# Altium PCB Badge_V2.PcbDoc
Units mm, origin at the board's own origin, x right, y up, seen from the top; angles counter-clockwise.
Board outline 100 x 100 mm, 2 copper layers (Top Layer, Bottom Layer); 48 components, 55 nets, 236 pads, 36 vias.
Unrouted connection lines stored in the file: 37.
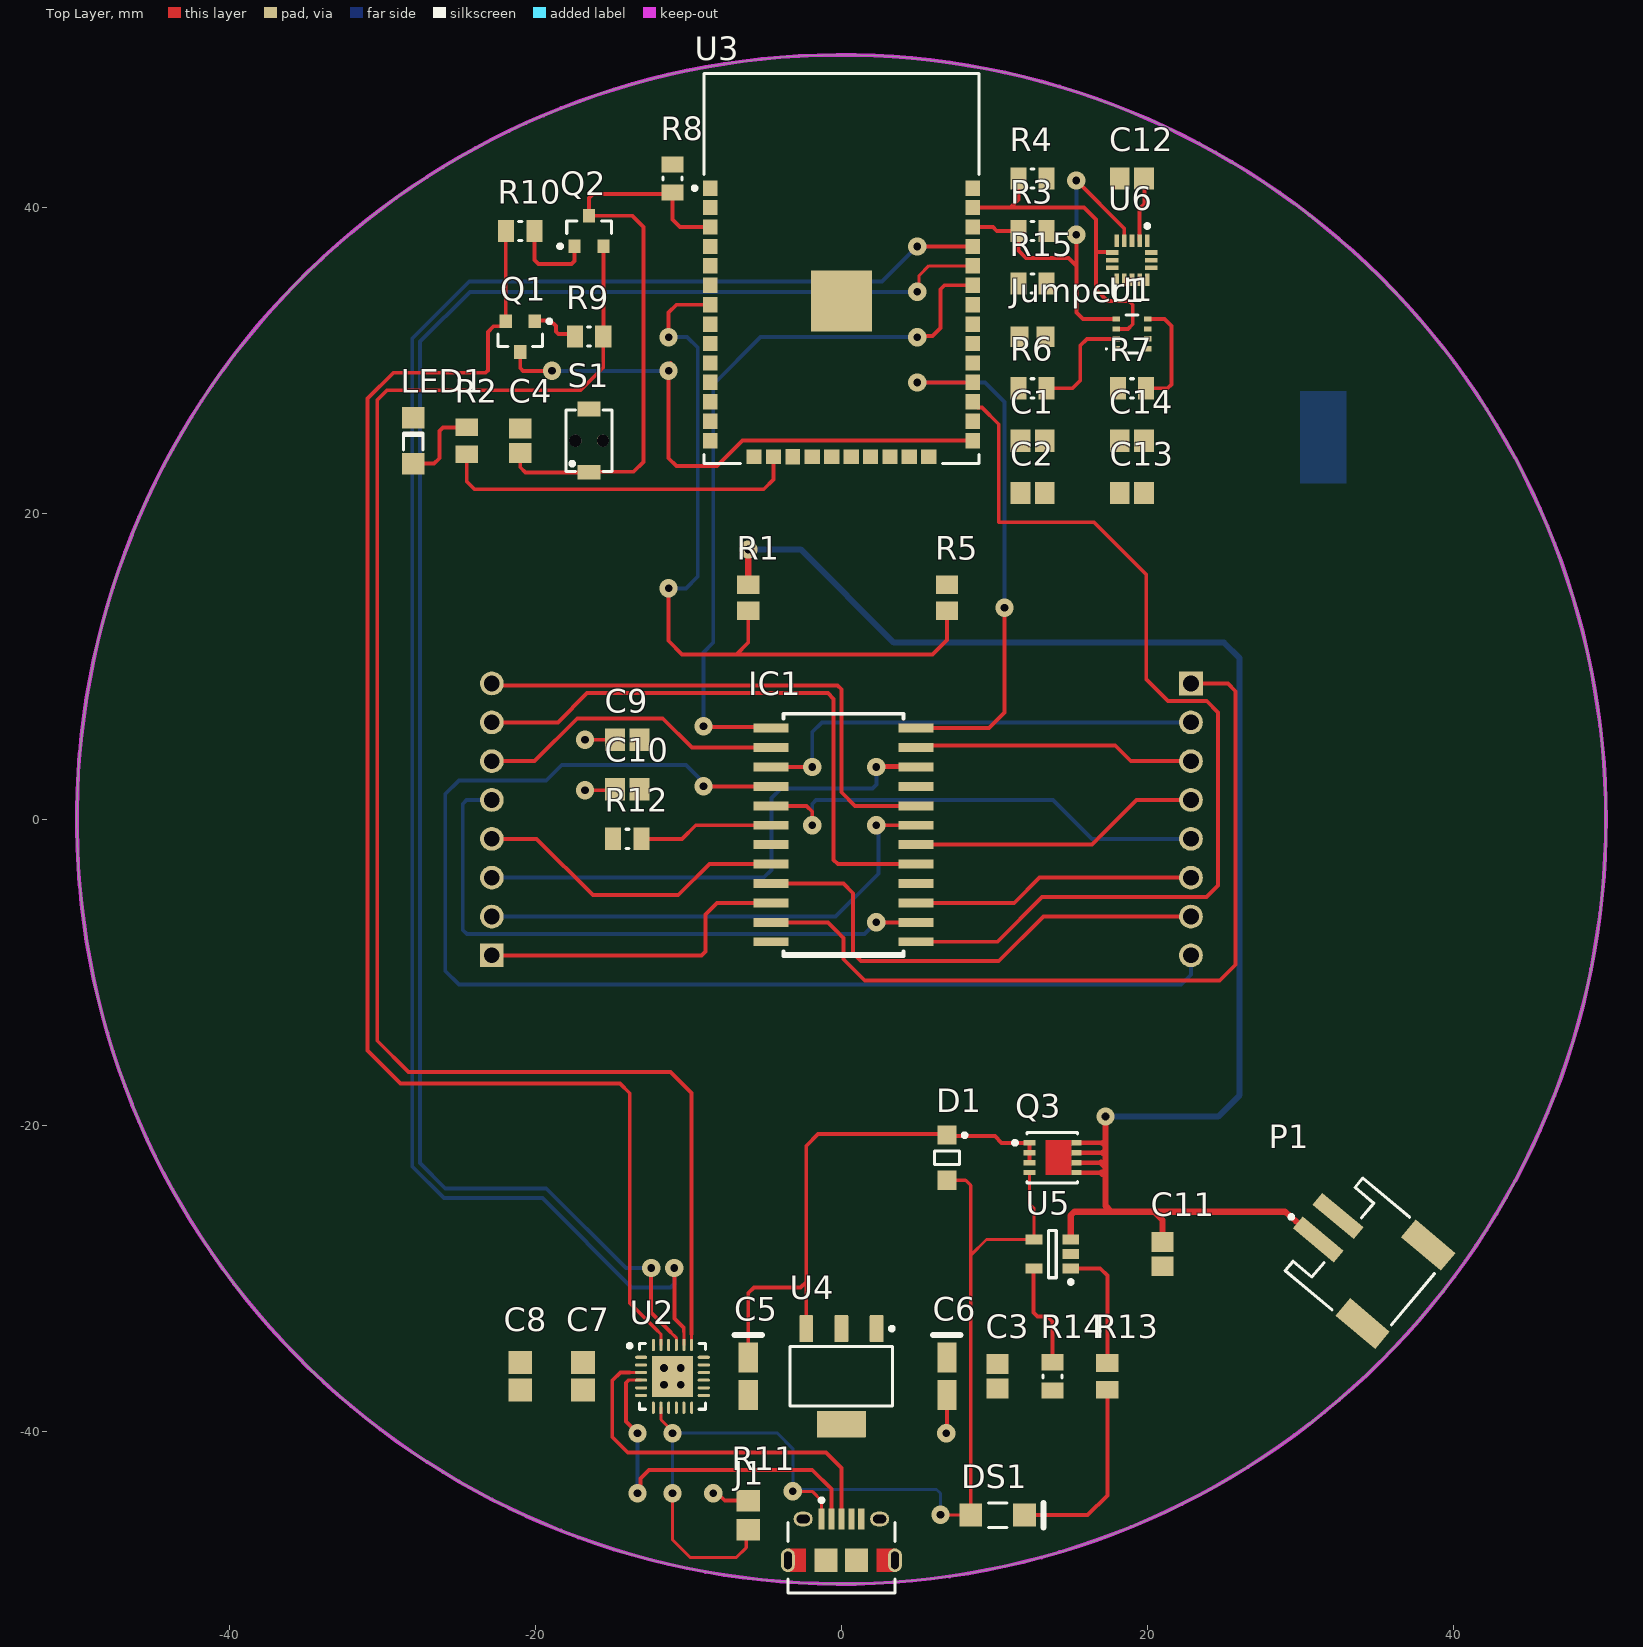
[diagram p0: Top Layer view]
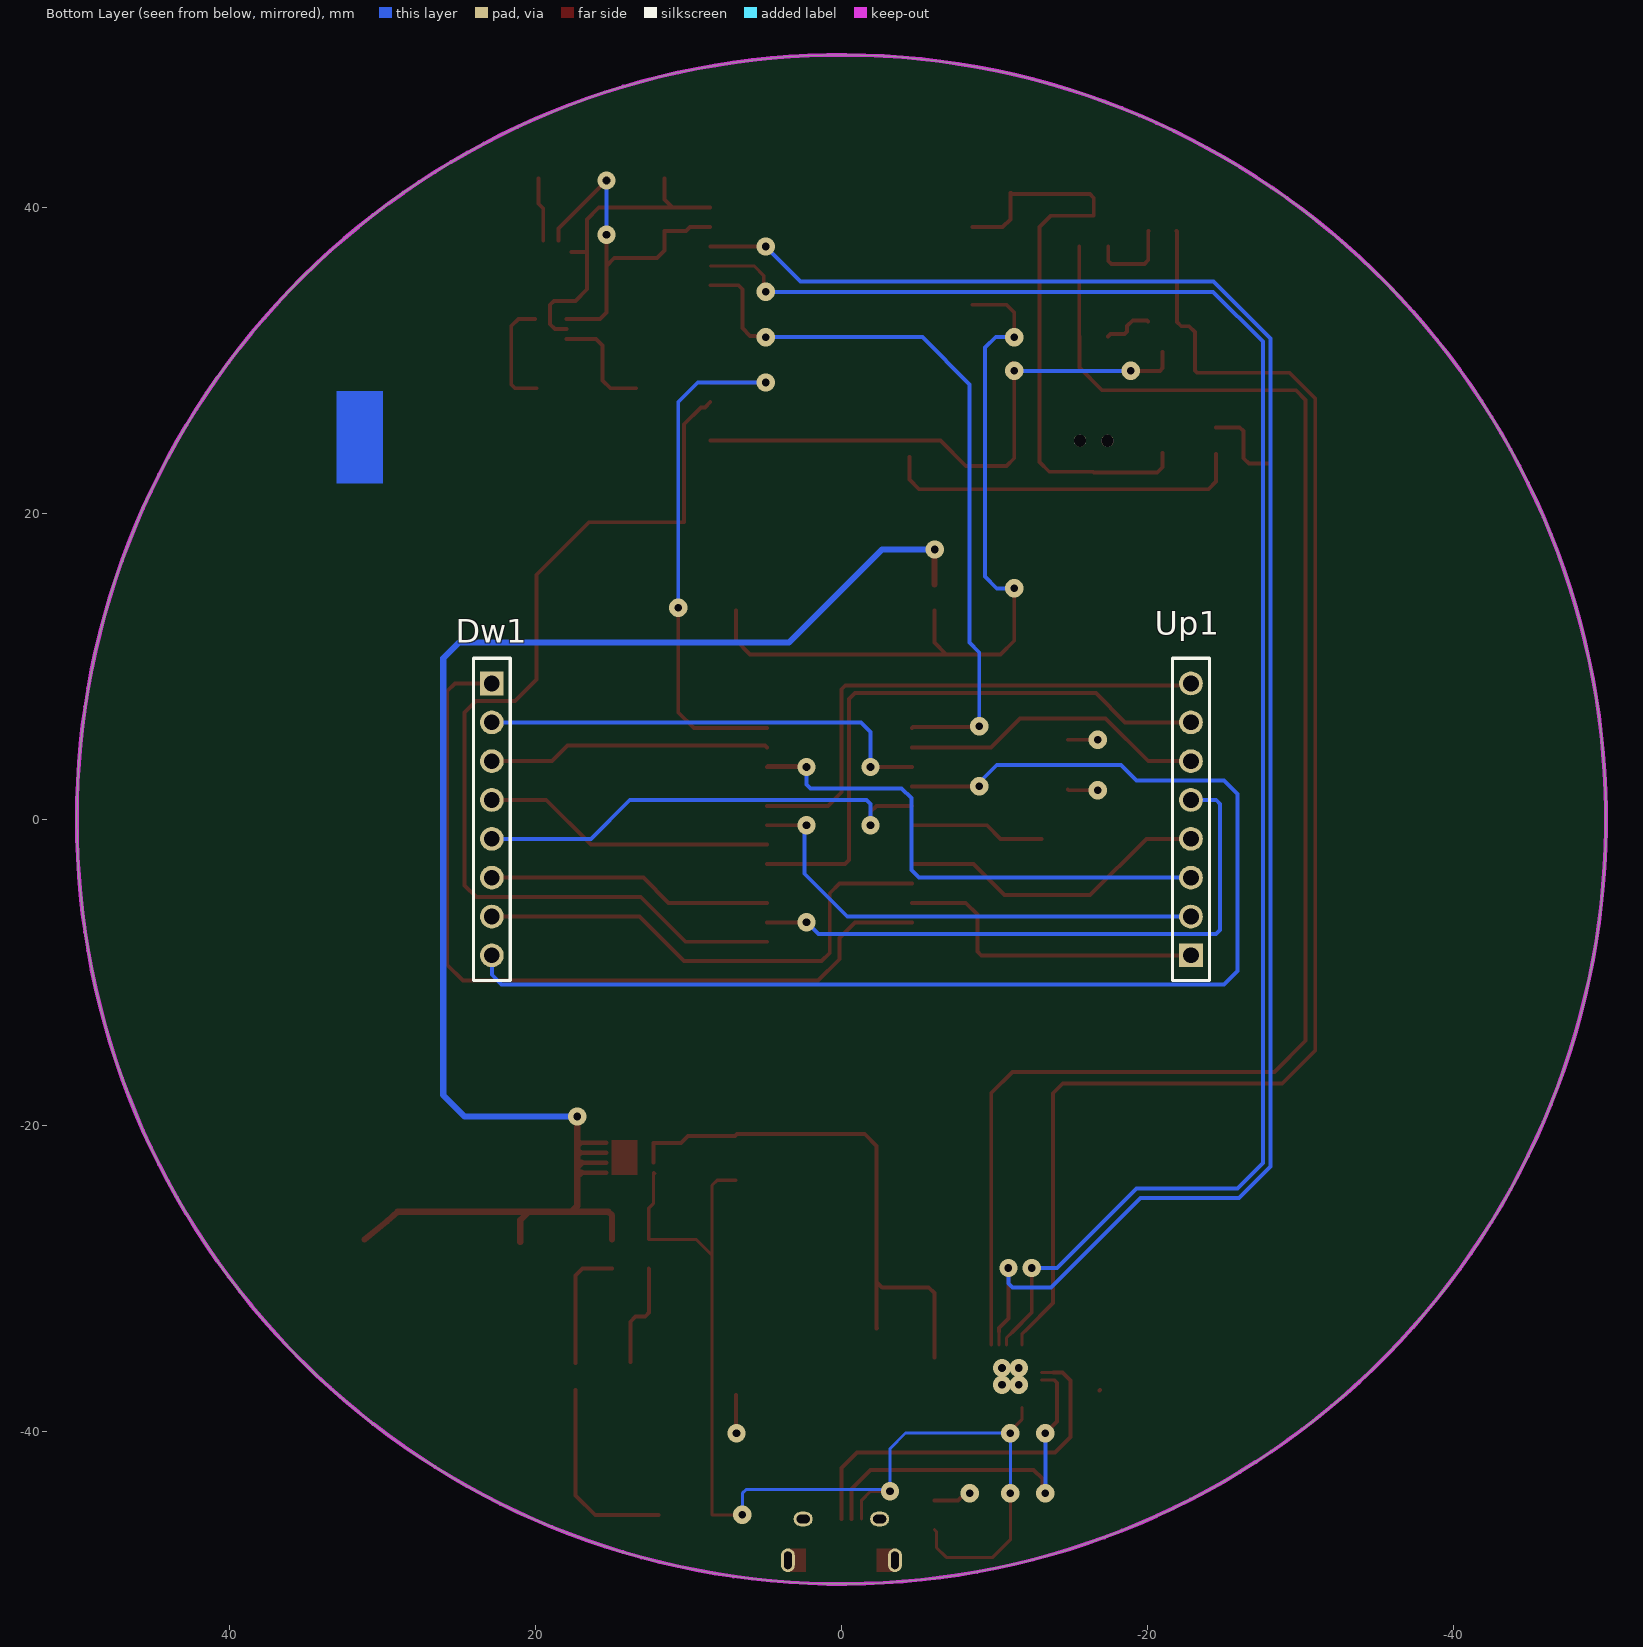
[diagram p1: Bottom Layer view, seen from below]

## Layer stack, top to bottom
Top Solder: solder mask 0.0102, Solder Resist, Dk 3.5
Top Layer: signal copper 0.0356
Dielectric 1: dielectric 0.32, FR-4, Dk 4.8
Bottom Layer: signal copper 0.0356
Bottom Solder: solder mask 0.0102, Solder Resist, Dk 3.5

## Board outline
-50,0 ccw(c0,0) 0,-50 ccw(c0,0) 50,0 ccw(c0,0) 0,50 ccw(c0,0)

## Design rules (kind name [scope] priority, off if disabled: settings)
Clearance [All] p1: gap=0.254 ignorepadtopadclearanceinfootprint=FALSE except(0: Arc-Hole Track-Hole SMDPad-Hole THPad-Hole Via-Hole Fill-Hole Poly-Hole Region-Hole Text-Hole; 0.19: Track-SMDPad SMDPad-SMDPad; 0.3: Arc-Poly Track-Poly SMDPad-Poly THPad-Poly Via-Poly Fill-Poly Poly-Poly)
PolygonConnect PolygonConnect_1 [(ObjectKind = 'Via')] p1: connectstyle=Direct reliefconductorwidth=0.254 reliefentries=4 polygonreliefangle="90 Angle" airgapwidth=0.254
PolygonConnect [All] p2: connectstyle=Relief reliefconductorwidth=0.254 reliefentries=4 polygonreliefangle="90 Angle" airgapwidth=0.254
RoutingVias [All] p1: holewidth=0.5 width=1.2 viastyle="Through Hole" minholewidth=0.5 minwidth=1.2 maxholewidth=0.8 maxwidth=2
SolderMaskExpansion [All] p1: expansion=0.102
Width [All] p1: maxlimit=2 minlimit=0.2 preferedwidth=0.4
30 further rules are at their usual default settings.

## Classes and differential pairs
component class USB_Serial_Converter: C3 J1 U2
component class Temp_Humidity_Pressure: C1 C2 R6 R7 U1
component class Regulator_3V3: C5 C6 C7 C8 D1 P1 Q3 R11 U4
component class MCU_WIFI_Bluetooth: C4 Q1 Q2 R8 R9 R10 S1 U3
component class Matrix_Led: C9 C10 Dw1 IC1 R12 Up1
component class Charger_Battery_LIPO: C11 DS1 R13 R14 U5
component class Badge: LED1 R1 R2 R3 R4 R5
component class Acelerometer: C12 C13 C14 Jumper1 R15 U6

## Components (designator, comment, footprint, x,y, rotation, side; value= is the part's Value field where it differs from the comment)
C1 "C0805C104J5RAC7800" CAPC2013X145X50NL20T25 12.5,24.765 r180 top
C2 "C0805C104J5RAC7800" CAPC2013X145X50NL20T25 12.5,21.336 r180 top
C3 "C0805C106K4PACTU" CAPC2013X140X50NL20T25 10.21,-36.424 r90 top
C4 "C0805C105K4RAC7800" CAPC2013X145X50NL20T25 -21,24.765 r270 top
C5 "T491A106K016AT" KEMT-A-3216-18-2_N -6.09,-36.424 r270 top
C6 "T491A106K016AT" KEMT-A-3216-18-2_N 6.9,-36.424 r270 top
C7 "C0805C105K4RAC7800" CAPC2013X145X50ML20T25 -16.9,-36.424 r270 top
C8 "C0805C106K4PACTU" CAPC2013X140X50ML20T25 -21,-36.424 r270 top
C9 "C0805C104J5RAC7800" CAPC2013X145X50NL20T25 -14,5.207 r0 top
C10 "C0805C104J5RAC7800" CAPC2013X145X50NL20T25 -14,1.968 r0 top
C11 "C0805C106K4PACTU" CAPC2013X140X50NL20T25 21,-28.424 r270 top
C12 "C0805C104J5RAC7800" CAPC2013X145X50NL20T25 19,41.91 r0 top
C13 "C0805C104J5RAC7800" CAPC2013X145X50NL20T25 19,21.336 r0 top
C14 "08053D475KAT2A" CAPC2013X140X50NL20T25 19,24.765 r0 top
D1 "MBR120ESFT1G" ONSC-SOD-123FL-2-498_V 6.9,-22.124 r270 top
DS1 "LTST-C150KSKT" LTST-C150KSKT_V 10.21,-45.5 r0 top
Dw1 "SSQ-108-01-G-S" SMTC-SSQ-108-01-X-S 22.86,8.89 r270 bottom
IC1 "MAX7219CWG+" 21-0042B_24-M 0.127,-1.016 r180 top value=Value
J1 "10118194-0001LF" FCI-10118194-0001LF-5_V 0,-47.1 r0 top
Jumper1 "" RESC2013X60X40NL20T25_A 12.5,31.573 r0 top
LED1 "150120VS75000" 1206_A -28,24.765 r270 top
P1 "S2B-PH-SM4-TB(LF)(SN)" "JST- S2B-PH-SM4-TB(LF)(SN)-2_V" 34.472,-28.925 r50 top
Q1 "MMBT2222ALT1G" ONSC-SOT-23-3-318-08_V -21,31.573 r270 top
Q2 "MMBT2222ALT1G" ONSC-SOT-23-3-318-08_V -16.5,38.481 r90 top
Q3 "BSZ086P03NS3 G" INF-PG-TSDSON-8-1_V 13.8,-22.124 r180 top
R1 "ERA6AEB104V" RESC2013X60X40NL20T25 -6.09,14.5 r90 top
R2 "ERJ-P06J102V" RESC2013X70X40NL20T20 -24.5,24.765 r270 top
R3 "RK73B2ATTD103J" RESC2013X60X30NL20T20 12.5,38.481 r0 top
R4 "RK73B2ATTD103J" RESC2013X60X30NL20T20 12.5,41.91 r0 top
R5 "ERA6AEB104V" RESC2013X60X40NL20T25 6.9,14.5 r270 top
R6 "RC0805JR-074K7L" RESC2013X60X30NL20T20 12.5,28.194 r180 top
R7 "RC0805JR-074K7L" RESC2013X60X30NL20T20 19,28.194 r180 top
R8 "RK73B2ATTD103J" RESC2013X60X30NL20T20 -11.049,41.91 r90 top
R9 "RK73B2ATTD103J" RESC2013X60X30NL20T20 -16.5,31.573 r0 top
R10 "RK73B2ATTD103J" RESC2013X60X30NL20T20 -21,38.481 r180 top
R11 "ERA6AEB104V" RESC2013X60X40ML20T25 -6.09,-45.5 r270 top
R12 "RK73B2ATTD103J" RESC2013X60X30NL20T20 -14,-1.27 r0 top
R13 "ERJ-P06J102V" RESC2013X70X40NL20T20 17.39,-36.424 r270 top
R14 "RC0805JR-074K7L" RESC2013X60X30NL20T20 13.8,-36.424 r270 top
R15 "RK73B2ATTD103J" RESC2013X60X30NL20T20 12.5,35.052 r180 top
S1 "PTS820J25MSMTRLFS" SMT_SW_PTS_820 -16.5,24.765 r90 top
U1 "BME280" BOSC-BME280-8_V 19,31.75 r180 top
U2 "CP2104-F03-GM" SLAB-QFN-24-2675x2675TP_M -11.049,-36.424 r0 top
U3 "ESP-WROOM-32 (16MB)" OLMX-ESP-WROOM-32 0,32.5 r0 top
U4 "LM1117MPX-3.3/NOPB" DCY0004A_N 0,-36.424 r270 top
U5 "MCP73831T-5ACI/OT" SOT-23-OT5_N 13.8,-28.424 r180 top
U6 "MMA8452QT" FRES-SOT1676-1_V 19,36.576 r270 top
Up1 "SSQ-108-01-G-S" SMTC-SSQ-108-01-X-S -22.86,-8.89 r90 bottom

## Footprints (in the part's own frame and the unit in brackets; to place one, negate y for a bottom-side part, rotate by r counter-clockwise, add the part's x,y. Pads: shape width x height; smd on the part's side, far side on the other; paste and mask are expansions set on the pad)
21-0042B_24-M [mil]
  rect 90x23 smd paste+0 mask+0: 1(-186.5,275) 2(-186.5,225) 3(-186.5,175) 4(-186.5,125) 5(-186.5,75) 6(-186.5,25) 7(-186.5,-25) 8(-186.5,-75) 9(-186.5,-125) 10(-186.5,-175) 11(-186.5,-225) 12(-186.5,-275) 13(186.5,-275) 14(186.5,-225) 15(186.5,-175) 16(186.5,-125) 17(186.5,-75) 18(186.5,-25) 19(186.5,25) 20(186.5,75) 21(186.5,125) 22(186.5,175) 23(186.5,225) 24(186.5,275)
  silkscreen extent -155,-312 155,312, body extent -209,-307 209,307, height 104
1206_A [mm] "Chip LED, 2-Leads, Body 3.2x1.6mm, IPC Medium Density"
  rect 1.4x1.5 smd: 1(-1.5,0) 2(1.5,0)
  silkscreen extent -0.5,-0.66 0.6,0.65, body extent -1.6,-0.8 1.6,0.8, height 0.68
BOSC-BME280-8_V [mm] "SMD, 8-Leads, Body 2.5x2.5mm, Pitch 0.65mm"
  rect 0.5x0.35 smd: 1(1.025,0.975) 2(1.025,0.325) 3(1.025,-0.325) 4(1.025,-0.975) 5(-1.025,-0.975) 6(-1.025,-0.325) 7(-1.025,0.325) 8(-1.025,0.975)
  silkscreen extent -0.39,-1.25 1.72,1.25, body extent -1.25,-1.25 1.25,1.25, height 1
CAPC2013X140X50ML20T25 [mm] "Chip Capacitor, 2-Leads, Body 2.00x1.25mm, IPC Low Density"
  rect 1.5x1.55 smd: 1(-0.9,0) 2(0.9,0)
  body extent -1.1,-0.72 1.1,0.72, height 1.4
CAPC2013X140X50NL20T25 [mm] "Chip Capacitor, 2-Leads, Body 2.00x1.25mm, IPC Medium Density"
  rect 1.3x1.45 smd: 1(-0.8,0) 2(0.8,0)
  body extent -1.1,-0.72 1.1,0.72, height 1.4
CAPC2013X145X50ML20T25 [mm] "Chip Capacitor, 2-Leads, Body 2.00x1.25mm, IPC Low Density"
  rect 1.5x1.55 smd: 1(-0.9,0) 2(0.9,0)
  body extent -1.1,-0.72 1.1,0.72, height 1.45
CAPC2013X145X50NL20T25 [mm] "Chip Capacitor, 2-Leads, Body 2.00x1.25mm, IPC Medium Density"
  rect 1.3x1.45 smd: 1(-0.8,0) 2(0.8,0)
  body extent -1.1,-0.72 1.1,0.72, height 1.45
DCY0004A_N [mm] "SOT223, 4-Leads, Body 6.7x3.7mm, Pitch 2.3mm, IPC Medium Density"
  rrect11% 1.75x0.9 smd: 1(-3.125,2.3) 2(-3.125,0) 3(-3.125,-2.3)
  rrect6% 1.75x3.2 smd: 4(3.125,0)
  silkscreen extent -3.25,-3.35 1.95,3.43, body extent -3.5,-3.25 3.5,3.25, height 1.62
FCI-10118194-0001LF-5_V [mm] "SMD, 5-Leads, Body 7x5mm, Pitch 0.65 mm"
  rect 0.4x1.35 smd: 1(-1.3,1.35) 2(-0.65,1.35) 3(0,1.35) 4(0.65,1.35) 5(1.3,1.35)
  oval 1.25x0.95 hole 0.55 slot 0.85 at 0 deg: 6(-2.5,1.35) 7(2.5,1.35)
  oval 0.9x1.55 hole 0.5 slot 1.15 at 90 deg: 8(-3.5,-1.35) 9(3.5,-1.35)
  rect 1.5x1.55 smd: 10(-1,-1.35) 11(1,-1.35)
  Top Layer region: 3.5,-2.125 3.5,-0.575 2.3,-0.575 2.3,-2.125
  Top Layer region: -2.3,-2.125 -2.3,-0.575 -3.5,-0.575 -3.5,-2.125
  silkscreen extent -3.5,-3.5 3.5,2.7, body extent -4.02,-4.03 4.02,1.55, height 2.72
FRES-SOT1676-1_V [mm] "QFN, 16-Leads, Body 3x3mm, Pitch 0.5mm"
  rect 0.813x0.305 smd paste-0.012 mask+0.051: 1(-1.275,1) 2(-1.275,0.5) 3(-1.275,0) 4(-1.275,-0.5) 5(-1.275,-1) 9(1.275,-1) 10(1.275,-0.5) 11(1.275,0) 12(1.275,0.5) 13(1.275,1)
  rect 0.305x0.813 smd paste-0.012 mask+0.051: 6(-0.5,-1.275) 7(0,-1.275) 8(0.5,-1.275) 14(0.5,1.275) 15(0,1.275) 16(-0.5,1.275)
  silkscreen extent -2.36,0.88 -2.11,1.13, body extent -1.5,-1.5 1.5,1.5, height 1
INF-PG-TSDSON-8-1_V [mm] "TSDSON, 8-Leads, Body 3.3x3.3mm, Pitch 0.65mm"
  rect 0.8x0.34 smd: 1(1.5,-0.975) 2(1.5,-0.325) 3(1.5,0.325) 4(1.5,0.975)
  rect 0.65x0.34 smd: 5(-1.575,0.975) 6(-1.575,0.325) 7(-1.575,-0.325) 8(-1.575,-0.975)
  Top Layer region: -1.25,-1.145 0.46,-1.145 0.46,1.145 -1.25,1.145
  silkscreen extent -1.65,-1.65 2.57,1.65, body extent -1.65,-1.65 1.65,1.65, height 1.1
"JST- S2B-PH-SM4-TB(LF)(SN)-2_V" [mm] "SMD, 2-Leads, Body 7.9x7.6mm, Pitch 2mm"
  rect 1x3.5 smd: 1(-1,3.45) 2(1,3.45)
  rect 1.5x3.4 smd: MP1(-3.35,-2.3) MP2(3.35,-2.3)
  silkscreen extent -3.95,-3.8 3.95,5.88, body extent -3.95,-3.8 3.95,4.8, height 5.6
KEMT-A-3216-18-2_N [mm] "Molded TAN Capacitor, 2-Leads, Body 3.4x1.8mm, IPC Medium Density"
  rect 1.95x1.25 smd: 1(-1.225,0) 2(1.225,0)
  silkscreen extent -2.7,-0.9 -2.7,0.9, body extent -1.7,-0.9 1.7,0.9, height 1.8
LTST-C150KSKT_V [mm] "SMD, 2-Leads, Body 3.2x1.6mm"
  rect 1.5x1.5 smd: 1(-1.75,0) 2(1.75,0)
  silkscreen extent -0.6,-0.8 3,0.8, body extent -1.6,-0.8 1.6,0.8, height 1.2
OLMX-ESP-WROOM-32 [mm] "SMD, 38-Leads, Body 18x25.5mm, Pitch 1.27mm"
  rect 0.95x1 smd: 1(-8.575,8.78) 2(-8.575,7.51) 3(-8.575,6.24) 4(-8.575,4.97) 5(-8.575,3.7) 6(-8.575,2.43) 7(-8.575,1.16) 8(-8.575,-0.11) 9(-8.575,-1.38) 10(-8.575,-2.65) 11(-8.575,-3.92) 12(-8.575,-5.19) 13(-8.575,-6.46) 14(-8.575,-7.73) 17(-3.175,-8.78) 25(8.575,-7.73) 26(8.575,-6.46) 27(8.575,-5.19) 28(8.575,-3.92) 29(8.575,-2.65) 30(8.575,-1.38) 31(8.575,-0.11) 32(8.575,1.16) 33(8.575,2.43) 34(8.575,3.7) 35(8.575,4.97) 36(8.575,6.24) 37(8.575,7.51) 38(8.575,8.78)
  rect 4x4 smd: 1(0,1.395)
  rect 1x0.95 smd: 15(-5.715,-8.78) 16(-4.445,-8.78) 18(-1.905,-8.78) 19(-0.635,-8.78) 20(0.635,-8.78) 21(1.905,-8.78) 22(3.175,-8.78) 23(4.445,-8.78) 24(5.715,-8.78)
  silkscreen extent -9.72,-9.23 9,16.27, body extent -9.04,-9.25 9.04,16.29, height 3.04
ONSC-SOD-123FL-2-498_V [mm] "SOD, 2-Leads, Body 2.7x1.65mm"
  rect 1.25x1.22 smd: 1(-1.475,0) 2(1.475,0)
  silkscreen extent -1.6,-0.82 0.45,1.29, body extent -1.35,-0.82 1.35,0.82, height 0.98
ONSC-SOT-23-3-318-08_V [mm] "SOT23, 3-Leads, Body 2.92x1.3mm, Pitch 0.95mm"
  rect 0.9x0.8 smd: 1(-1,0.95) 2(-1,-0.95) 3(1,0)
  silkscreen extent -1.12,-1.46 0.65,2.03, body extent -0.65,-1.46 0.65,1.46, height 1.11
RESC2013X60X30NL20T20 [mm] "Chip Resistor, 2-Leads, Body 2.00x1.25mm, IPC Medium Density"
  rect 1.05x1.45 smd: 1(-0.925,0) 2(0.925,0)
  silkscreen extent -0.1,-0.63 0.1,0.63, body extent -1.1,-0.72 1.1,0.72, height 0.6
RESC2013X60X40ML20T25 [mm] "Chip Resistor, 2-Leads, Body 2.00x1.25mm, IPC Low Density"
  rect 1.4x1.55 smd: 1(-0.95,0) 2(0.95,0)
  body extent -1.1,-0.72 1.1,0.72, height 0.6
RESC2013X60X40NL20T25 [mm] "Chip Resistor, 2-Leads, Body 2.00x1.25mm, IPC Medium Density"
  rect 1.2x1.45 smd: 1(-0.85,0) 2(0.85,0)
  body extent -1.1,-0.72 1.1,0.72, height 0.6
RESC2013X60X40NL20T25_A [mm] "Chip Resistor, 2-Leads, Body 2.20x1.35mm, IPC Medium Density"
  rect 1.2x1.35 smd: 1(-0.85,0) 2(0.85,0)
  body extent -1.1,-0.67 1.1,0.67, height 0.6
RESC2013X70X40NL20T20 [mm] "Chip Resistor, 2-Leads, Body 2.00x1.25mm, IPC Medium Density"
  rect 1.15x1.45 smd: 1(-0.875,0) 2(0.875,0)
  body extent -1.1,-0.72 1.1,0.72, height 0.7
SLAB-QFN-24-2675x2675TP_M [mm] "QFN, 24-Leads, Body 4x4mm, Pitch 0.5mm, Thermal Pad 2.68x2.68mm, IPC Low Density"
  oval 0.8x0.2 smd: 1(-2.05,1.25) 2(-2.05,0.75) 3(-2.05,0.25) 4(-2.05,-0.25) 5(-2.05,-0.75) 6(-2.05,-1.25) 13(2.05,-1.25) 14(2.05,-0.75) 15(2.05,-0.25) 16(2.05,0.25) 17(2.05,0.75) 18(2.05,1.25)
  oval 0.2x0.8 smd: 7(-1.25,-2.05) 8(-0.75,-2.05) 9(-0.25,-2.05) 10(0.25,-2.05) 11(0.75,-2.05) 12(1.25,-2.05) 19(1.25,2.05) 20(0.75,2.05) 21(0.25,2.05) 22(-0.25,2.05) 23(-0.75,2.05) 24(-1.25,2.05)
  rect 2.68x2.68 smd: 25(0,0)
  silkscreen extent -2.92,-2.15 2.15,2.15, body extent -2,-2 2,2, height 0.8
SMT_SW_PTS_820 [mm] "SMT Tactile Switch PTS 820 Series"
  rect 0.95x1.5 smd: 1(-2.075,0) 2(2.075,0)
  round 0.8 hole 0.8 unplated: MH1(0,0.9) MH2(0,-0.9)
  silkscreen extent -2,-1.5 2,1.5, body extent -2.25,-1.55 2.25,1.55, height 2.05
SMTC-SSQ-108-01-X-S [mm] "SQ Post Socket, 1x8 Pins, Vertical, 2.54mm Pitch, Female"
  rect 1.55x1.55 hole 1.02: 1(0,0)
  round 1.55 hole 1.02: 2(2.54,0) 3(5.08,0) 4(7.62,0) 5(10.16,0) 6(12.7,0) 7(15.24,0) 8(17.78,0)
  silkscreen extent -1.65,-1.2 19.43,1.2, body extent -1.52,-1.21 19.3,1.21, height 8.51
SOT-23-OT5_N [mm] "SOT23, 5-Leads, Body 2.9x1.7mm, Pitch 0.95mm, Lead Span 2.8mm, IPC Medium Density"
  rect 1.1x0.65 smd: 1(-1.2,0.95) 2(-1.2,0) 3(-1.2,-0.95) 4(1.2,-0.95) 5(1.2,0.95)
  silkscreen extent -1.33,-1.55 0.25,1.95, body extent -0.9,-1.55 0.9,1.55, height 1.45

## Part data
C1 C2 C9 C10 C12 C13: library part CMP-2007-01102-1, "0.1µF ±5% 50V Ceramic Capacitor X7R 0805 (2012 Metric)", Manufacturer=Kemet, Part Number=C0805C104J5RAC7800
C3 C8 C11: library part CMP-2007-03242-1, "10µF ±10% 16V Ceramic Capacitor X5R 0805 (2012 Metric)", Part Number=CL21A106KOQNNNG
C4 C7: library part CMP-2007-01082-1, "1µF ±10% 16V Ceramic Capacitor X7R 0805 (2012 Metric)", Manufacturer=Kemet, Part Number=C0805C105K4RAC7800
C5 C6: library part CMP-2000-05173-1, "Capacitor, Tantalum, 10 uF, +/- 10%, 16 V, -55 to 125 degC, 2-Pin SMD (1206), RoHS, Tape and Reel", Capacitance=10uF, Case Code=A, Case Style=Molded, Manufacturer=Kemet, Operating Temp Range=-55Cto125C, Package / Case=3216-18, Package Description="2-Pin Surface Mount Device, Body 3.2 x 1.6 mm", Package Reference=1206, Tolerance (+ or -)=10%, Voltage=16VDC, Construction=SMTChip, Datasheet URL=http://www.farnell.com/datasheets/1824869.pdf, Datasheet Version=Apr-14, DCL=1.6uA, DF=8%, ESR=7ohm, Failure Rate=NotRequired, Insulation=NotRequired, Lead Spacing (nom)=NotRequiredmm, Length W/Weld=NotRequiredmm, Manufacturer URL=http://www.kemet.com/, Mounting Style=SurfaceMount, Packaging=TapeandReel, Polarity=Polar, Product Depth (mm)=1.6mm, Product Diameter (mm)=NotRequiredmm, Product Height (mm)=1.6mm, Product Length (mm)=3.2mm, Seal=NotRequired, Seated Plane Height=NotRequiredmm, Wire Form=NotRequired
C14: library part CMP-2007-04614-1, "4.7µF ±10% 25V Ceramic Capacitor X5R 0805 (2012 Metric)", Manufacturer="AVX Interconnect / Elco", Part Number=08053D475KAT2A
D1: library part CMP-1055-00434-1, "Schottky Power Rectifier, 2-Pin SOD-123, Pb-Free, Tape and Reel", Manufacturer="On Semiconductor", ComponentLink1Description="Manufacturer URL", ComponentLink1URL=http://www.onsemi.com/, ComponentLink2Description=Datasheet, ComponentLink2URL=http://www.onsemi.cn/pub_link/Collateral/MBR120ESFT1-D.PDF, ComponentLink3Description="Package Specification", ComponentLink3URL=http://www.onsemi.com/pub_link/Collateral/498-01.PDF, Configuration=Single, DatasheetVersion="Rev. 4", IFSM Max (A)=40, Mounting Technology="Surface Mount", PackageDescription="2-Pin SOD, Body 1.65 x 2.7 mm", PackageReference=SOD-123FL-2-498, PackageVersion="Rev. D, 05/2013", Packing="Tape and Reel", PartNumber=MBR120ESFT1G, RoHS=TRUE
DS1: library part CMP-2000-06618-1, "LED Yellow, 75 mW, 80 mA, -55 to 85 degC, 2-Pin SMD, RoHS, Tape and Reel", Emitting Color=Amber, Forward Current=30mA, Forward Voltage=2.4V, Manufacturer=Lite-On, Operating Temperature Classification=Industrial, Operating Temp Range=-55Cto85C, Package Description="2-Pin Surface Mount Device, Body 3.2 x 1.6 mm", Package Reference=C150KSKT, Package Type=ChipLed, Power Dissipation=75W, Reverse Voltage=5V, Test Current (It)=20mA, Chip Material=AlGaInP, Datasheet URL=http://optoelectronics.liteon.com/upload/download/DS-22-99-0187/S_110_LTST-C150KSKT.pdf, Datasheet Version="Rev. E, 02/2005", DELETED=Compliant, Dominant Wave Length=587nm, High Brightness=Yes, Lens Dimensions=2.06X1.6X0.6mm, Luminous Intensity=60mcd, Lum Intensity=60mcd, Main Category=ChipLED, Manufacturer URL=http://www.us.liteon.com/, Mounting=SurfaceMount, Mounting Technology=SurfaceMount, Number of  Elements=1, Packaging=TapeandReel, Peak Wavelength=588nm, Pin Count=2, Product Depth (mm)=1.6mm, Product Height (mm)=1.1mm, Product Length (mm)=3.2mm, Rad Hardened=No, Shape Type=Rectangular, Type=Uni-Color, Viewing Angle=130deg
Dw1 Up1: library part CMP-1023-00292-1, "SQ Post Socket, Through-hole, Vertical, -55 to 125 degC, 2.54 mm Pitch, 8-Pin, Female, RoHS", Manufacturer=Samtec, Temperature Range="-55 to 125 degC", ComponentLink1Description="Manufacturer URL", ComponentLink1URL=http://www.samtec.com, ComponentLink2Description=Datasheet, ComponentLink2URL=http://www.samtec.com/documents/webfiles/pdf/SSQ_TH.PDF, ComponentLink3Description="Package Specification", ComponentLink3URL=http://www.samtec.com/documents/webfiles/cpdf/SSQ-1XX-XX-XXX-X-XX-XXX-XX-X-MKT.pdf, DatasheetVersion=F-214, Mounting Technology=Through-hole, Orientation=Vertical, PackageDescription="Assembly, Socket Strip .025[0.64] SQ Tail", PackageReference=SSQ-108-01-X-S, PackageVersion="BD, 6/1987", PartNumber=SSQ-108-01-G-S, Pitch="2.54 mm", RoHS=True
IC1: "LED Driver 24-SOIC", Built_By=EMA_UL_Team, Copyright="Copyright (C) 2018 Accelerated Designs. All rights reserved", Manufacturer_Part_Number=MAX7219CWG+, RefDes=RefDes, Type=DEV, Vendor="Maxim Integrated Products"
J1: library part CMP-2000-05120-1, "Micro USB B Type Receptacle, 1.8 A, -55 to 85 degC, 5-Pin SMD, RoHS, Tape and Reel", Manufacturer="Amphenol FCI", Package Description="5-Pin Surface Mount Device, Body 8.05 x 5.53 mm, Pitch 0.65 mm", Package Reference=10118194-0001LF-5, Body Orientation=RightAngle, Datasheet URL=https://datasheet.ciiva.com/26945/getdatasheetpartid-418619-26945695.pdf, Datasheet Version="Rev. A, 10/2011", Gender=RCP, Manufacturer URL=http://www.fci.com/, Mounting=SurfaceMount, Number of Contacts=5, Packaging=CutTape, Pitch=0.65mm, Rad Hard=No, Termination Method=Solder, Type=MicroUSBTypeB
Jumper1: library part CMP-2000-06228-1, Case Code - in=0805, Case Code - mm=2012, Manufacturer=Panasonic, Operating Temperature Range=-55Cto+155C, Package / Case=0805(2012metric), Package Description="2-Pin Surface Mount Device, Body 2 x 1.25 mm", Power Rating=125mW(1/8W), Resistance=10kOhms, Temperature Coefficient=25PPM/C, Tolerance=0.1%, Voltage Rating=100V, Brand=Panasonic, Factory Pack Quantity=5000, Height=0.5mm, Length=2mm, Manufacturer URL=http://www.panasonic.com/, Mounting Technology=SurfaceMount, Package Reference=0805, Packaging=Reel, Product=ThinFilmResistorsSMD, Product Category=ThinFilmResistors-SMD, RoHS=Details, Series=ERA-6A, Termination Style=SMD/SMT, Type=MetalFilmChipResistors, Width=1.25mm
LED1: library part CMP-1426-00016-1, "SMD mono-color Chip LED, WL-SMCW, Bright Green", Color="Bright Green", Manufacturer="Wuerth Elektronik", ComponentLink1Description="Manufacturer URL", ComponentLink1URL=http://www.we-online.com, ComponentLink2Description=Datasheet, ComponentLink2URL=http://katalog.we-online.com/led/datasheet/150120VS75000.pdf, PackageReference=1206_A, PartNumber=150120VS75000
P1: library part CMP-1755-00001-1, "Male Header, Pitch 2 mm, 1 x 2 Position, Height 5.5 mm, -25 to 85 degC, RoHS, Tape and Reel", Colour=Black, Current Rating="3 A", Max Operating Temperature=105degC, Min Operating Temperature=-65degC, Package Quantity=100, ComponentLink1Description="Manufacturer URL", ComponentLink1URL=http://www.jst.com/home2.html, ComponentLink2Description=Datasheet, ComponentLink2URL=http://www.jst-mfg.com/product/pdf/eng/ePH.pdf, Contact Finish=Lead, Contact Material=Bronze, Contact Plating=Tin, DatasheetVersion=Dec-12, Height="8.13 mm", Lead Pitch="0.1 inch", Length="101.19 mm", Mount="Through Hole", PackageDescription="Male Header, Pitch 2 mm, 1 x 2 Position, Height 5.5 mm", PackageReference=S2B-PH-SM4-TB(LF)(SN)-2, Packaging=Bulk, Pins=40, Radiation Hardening=No, RoHSCompliant=True, Width="2.34 mm"
Q1 Q2: library part CMP-1048-00538-1, "General Purpose Transistor, NPN Silicon, 3-Pin SOT-23, Pb-Free, Tape and Reel", Manufacturer="On Semiconductor", ComponentLink1Description="Manufacturer URL", ComponentLink1URL=http://www.onsemi.com/, ComponentLink2Description=Datasheet, ComponentLink2URL=http://www.onsemi.cn/pub_link/Collateral/MMBT2222LT1-D.PDF, ComponentLink3Description="Package Specification", ComponentLink3URL=http://www.onsemi.cn/pub_link/Collateral/318-08.PDF, DatasheetVersion="Rev. 10", fT Min (MHz)=300, IC Continuous (A)=0.6, Mounting Technology="Surface Mount", PackageDescription="3-Pin Small Outline Transistor, Body 2.92 x 1.3 mm, Pitch 0.95 mm", PackageReference=SOT-23-3-318-08, PackageVersion="Rev. AP, 11/2009", Packing="Tape and Reel", PartNumber=MMBT2222ALT1G, Polarity=NPN, RoHS=TRUE
Q3: library part CMP-1099-00063-1, "P-Channel OptiMOS P3 Power-Transistor, -30 V VDS, -40 A ID, -55 to 150 degC, PG-TSDSON-8-1, Reel, Green", Manufacturer=Infineon, ComponentLink1Description="Manufacturer URL", ComponentLink1URL=http://www.infineon.com/, ComponentLink2Description=Datasheet, ComponentLink2URL=http://www.infineon.com/dgdl/BSZ086P03NS3+G_2.03.pdf?folderId=db3a304314dca38901154a7313d21a66&fileId=db3a30431ff9881501203d3a5e7d17a9, ComponentLink3Description="Package Specification", ComponentLink3URL=http://www.infineon.com/dgdl/BSZ240N12NS3+Rev2.0.pdf?folderId=db3a304313b8b5a60113cee8763b02d7&fileId=db3a30432a40a650012a42f3057a0038, DatasheetVersion="Rev. 2.03", Green=TRUE, Halogen-free=TRUE, ID (max)="-40 A", IDpuls (max)="-160 A", Mounting Technology="Surface Mount", PackageDescription="8-Pin Plastic (Green) Thin Dual Small Outline Non-Leaded Package, 3.3 x 3.3 mm Body, 0.65 mm Pitch", PackageReference=PG-TSDSON-8-1, PackageVersion="Rev. 02, 09/2008", Packing=Reel, Part Number="BSZ086P03NS3 G", Pto t (max)="69 W", QG="43.2 nC", RDS (on) (max)="8.6 mOhm", Rth="1.8 K/W", RthJC (max)="1.8 K/W", VDS (max)="-30 V", VGS(th) (max)="-1.9 V", VGS(th) (min)="-3.1 V"
R1 R5 R11: library part CMP-2001-00583-1, "100 kOhms ±0.1% 0.125W, 1/8W Chip Resistor 0805 (2012 Metric) Automotive AEC-Q200 Thin Film", Manufacturer=Panasonic, Part Number=ERA6AEB104V
R2 R13: library part CMP-2001-00477-1, "RES SMD 1K OHM 5% 1/2W 0805", Manufacturer=Panasonic, Part Number=ERJ-P06J102V
R3 R4 R8 R9 R10 R12 R15: library part CMP-2001-04657-1, "10 kOhms ±5% 0.25W, 1/4W Chip Resistor 0805 (2012 Metric) Automotive AEC-Q200, Moisture Resistant Thick Film", Manufacturer="KOA Speer", Part Number=RK73B2ATTD103J
R6 R7 R14: "4.7 kOhms ±5% 0.125W, 1/8W Chip Resistor 0805 (2012 Metric) Moisture Resistant Thick Film", Manufacturer=Yageo, Part Number=RC0805JR-074K7L
S1: "Tactile Switch SPST-NO Top Actuated Surface Moun"
U1: library part CMP-2000-05073-1, "Combined Humidity and Pressure Sensor, 1.71 to 3.6 V, -40 to 85 degC, 8-Pin SMD, RoHS, Tape and Reel", Manufacturer="Bosch Sensortec", ComponentLink1Description=BME280, ComponentLink1URL=https://co.mouser.com/ProductDetail/Bosch-Sensortec/BME280?qs=sGAEpiMZZMsF1ODjcwEocB0teEbUEBlMe2ty%252bXJvNLw%3d, Datasheet URL=http://datasheet.octopart.com/BME280-Bosch-datasheet-58577763.pdf, Datasheet Version="Rev. 1.2, 10/2015", Manufacturer URL=http://www.bosch-sensortec.com
U2: library part CMP-0511-00004-1, "Single-Chip USB to UART Bridge, 4 Dig I/O Pins, Internal Oscillator, 1024 Bytes EEPROM, -40 to 85 degC, 24-pin QFN", Manufacturer="Silicon Labs", Code_IPC=J-STD-020, Code_JEDEC=MO-220, ComponentLink1Description="Manufacturer URL", ComponentLink1URL=http://www.silabs.com/, ComponentLink2Description=Datasheet, ComponentLink2URL=http://www.silabs.com/Support%20Documents/TechnicalDocs/cp2104.pdf, ComponentLink3Description="Package Specification", ComponentLink3URL=http://www.silabs.com/Support%20Documents/TechnicalDocs/C8051F93x-92x.pdf, DatasheetVersion="Rev. 1.0", EEPROM="1024 Bytes", Internal Oscillator=TRUE, Mounting Technology="Surface Mount", PackageDescription="24-Pin Quad-Flat No-Leads Package, Body 4 x 4 mm, Pitch 0.5 mm", PackageReference=QFN-24, PartNumber=CP2104-F03-GM, Sub-Family="USB Bridges"
U3: library part CMP-2000-07454-1, "Espressif System, 2.7 to 3.6 V, -40 to 85 degC, 38-Pin SMD", Package Description="38-Pin Surface Mount Device, Body 18 x 25.5 mm, Pitch 1.27 mm", Mounting Technology=SurfaceMount, Package Reference="ESP-WROOM-32 (16MB)", RoHSCompliant=false
U4: library part CMP-0062-01639-4, "800mA Low-Dropout Linear Regulator, 4-pin SOT-223, Pb-Free", Manufacturer="Texas Instruments", PackageTopMarking=XYTT*N05A, PowerWise=N, Code_IPC=SOT223-4, Code_JEDEC=TO-261-AA, ComponentLink1Description="Datasheet URL", ComponentLink1URL=http://www.ti.com/general/docs/lit/getliterature.tsp?genericPartNumber=LM1117-N&fileType=pdf, CompType="LDO IC", High-Reliability=Y, PackageDescription="Molded SOT-223, 6.50 x 3.56 x 1.6mm Body, 4 Lead, 2.3mm Pitch", PackageReference=DCY0004A, PartNumber=LM1117MPX-3.3/NOPB, PinCount=4, RoHS=Y
U5: library part CMP-0133-00136-1, "Miniature Single-Cell, Fully Integrated Li-Ion, Li-Polymer Charge Management Controller, 4.5V, 5-Pin SOT-23, Industrial Temperature, Tape and Reel", Code_IPC=SOT23-5, DatasheetVersion="revE, Sep-2008", PackageDescription="5-Lead Plastic Small Outline Transistor (OT) [SOT-23]", PackageReference=SOT-23-OT5, PackageVersion="revBB, Aug-2009"
U6: library part CMP-2000-06726-1, "3-Axis, 12-Bit / 8-Bit Digital Accelerometer, 1.95 to 3.6 V, -40 to 85 degC, 16-Pin QFN (SOT1676-1), RoHS, Tray", Frequency Response Range=0?400kHz, Manufacturer=Freescale, Maximum Frequency Response=400kHz, Maximum Operating Supply Voltage=3.6V, Maximum Operating Temperature=+85°C, Minimum Frequency Response=0kHz, Minimum Operating Supply Voltage=1.95V, Minimum Operating Temperature=-40°C, Operating Supply Voltage Range=1.95?3.6V, Operating Temperature Range=-40?+85°C, Package Description="16-Pin Quad Flat No-lead Package, Body 3 x 3 mm, Pitch 0.5 mm", Package Reference=SOT1676-1, Package Type=QFN, Package Version="Rev. B, 01/2016", Datasheet URL=http://cache.nxp.com/files/sensors/doc/data_sheet/MMA8452Q.pdf?fpsp=1&WT_TYPE=Data%20Sheets&WT_VENDOR=FREESCALE&WT_FILE_FORMAT=pdf&WT_ASSET=Documentation&fileExt=.pdf, Datasheet Version="Rev. 10, 04/2016", Dimensions=3x3x1mm, Height=1mm, Interface Type=Serial-I2C, Length=3mm, Manufacturer URL=http://www.nxp.com/, Mounting Technology=SurfaceMount, Mounting Type=SurfaceMount, Noise=99µg/vHz, Number of Axis=3, Package URL=http://cache.freescale.com/files/shared/doc/package_info/98ASA00063D.pdf, Pin Count=16, Sensitivity=256counts/g,512counts/g,1024counts/g, Sensor Range=±2g,±4g,±8g, Technology=Digital, Width=3mm

## Via types
v1: diameter 1.2, hole 0.5, Top Layer to Bottom Layer, tented both sides, 36 vias

## Nets (pads, with @x,y where several pads share a name; then routed paths per layer and width w, separated by ;. In a path a pad name is that pad's centre, name@x,y a point inside that pad or via, vN(x,y) a via of type N, cw(c..) or ccw(c..) an arc to the next point about the centre after c; other vN are vias at no path point)
3V3: C1.2 C2.2 C3.2 C6.1 C7.2 C8.2 C9.2 C10.2 C13.2 C14.2 IC1.19 R3.2 R4.2 R6.2 R7.2 R8.2 R12.1 R15.2 U1.6 U1.8 U2.5 U2.6 U2.7 U3.2 U4.2 U4.4 U6.1 U6.14 | length 0
  Top Layer w0.254: C7.2 C7.2@-16.886,-37.338
A0: U3.11
A1: U3.10
A2: U3.6
A3: U3.5
A4: U3.4
A5: U3.26
A6: U3.13
A7: U3.8
CLK: IC1.13 U3.33 | length 48.2
  Top Layer w0.254: v1(-9.017,6.096) -8.954,6.032 -4.674,6.032 IC1.13 ; v1(4.953,31.538) 5.038,31.623 5.969,31.623 6.477,32.131 6.477,34.671 6.736,34.93 U3.33
  Bottom Layer w0.254: v1(-9.017,6.096) -9.017,10.922 -8.382,11.557 -8.382,28.448 -5.292,31.538 v1(4.953,31.538)
COL1: IC1.2 Up1.5 | length 40.3
  Top Layer w0.254: v1(2.286,-6.731) IC1.2
  Bottom Layer w0.254: Up1.5 -24.511,1.27 -24.765,1.016 -24.765,-7.239 -24.498,-7.506 1.511,-7.506 v1(2.286,-6.731)
COL2: Dw1.3 IC1.11 | length 18.5
  Top Layer w0.254: IC1.11 4.991,4.826 17.907,4.826 18.923,3.81 Dw1.3
COL3: Dw1.4 IC1.6 | length 19.2
  Top Layer w0.254: IC1.6 16.383,-1.651 19.304,1.27 Dw1.4
COL4: IC1.7 Up1.2 | length 32.3
  Top Layer w0.254: v1(2.286,-0.381) IC1.7
  Bottom Layer w0.254: Up1.2 -0.381,-6.35 2.413,-3.556 v1@2.413,-0.254
COL5: Dw1.6 IC1.3 | length 18.7
  Top Layer w0.254: IC1.3 11.303,-5.461 12.954,-3.81 Dw1.6
COL6: IC1.10 Up1.3 | length 36.9
  Top Layer w0.254: v1@2.286,3.556 v1@2.349,3.492 ; v1@2.349,3.492 2.413,3.429 IC1.10 4.801,3.492 v1@2.349,3.492
  Bottom Layer w0.254: Up1.3 -5.08,-3.81 -4.572,-3.302 -4.572,1.397 -3.937,2.032 2.032,2.032 2.286,2.286 v1(2.286,3.429) v1@2.286,3.556
COL7: IC1.5 Up1.7 | length 39.3
  Top Layer w0.254: Up1.7 -18.542,6.35 -16.637,8.255 -0.889,8.255 -0.508,7.874 -0.508,-2.645 -0.232,-2.921 IC1.5
COL8: IC1.8 Up1.8 | length 35
  Top Layer w0.254: Up1.8 -22.733,8.763 -0.254,8.763 0,8.509 0,1.778 0.889,0.889 IC1.8
CS: IC1.12 U3.28 | length 36.3
  Top Layer w0.254: IC1.12 9.652,5.969 10.668,6.985 v1(10.668,13.843) ; v1(4.953,28.575) 8.57,28.575 U3.28
  Bottom Layer w0.254: v1@5.08,28.575 9.398,28.575 10.668,27.305 v1(10.668,13.843)
D+: J1.3 U2.3 | length 25
  Top Layer w0.2: -13.86,-36.166 -13.852,-36.174 U2.3
  Top Layer w0.254: -13.86,-36.166 -14.448,-36.166 -14.986,-36.704 -14.986,-40.386 -13.97,-41.402 -1.016,-41.402 0,-42.418 J1.3
D-: J1.2 U2.4 | length 24.8
  Top Layer w0.2: -13.929,-36.674 U2.4
  Top Layer w0.254: -13.929,-36.674 -14.097,-36.842 -14.097,-39.37 v1(-13.335,-40.132) ; v1(-13.335,-44.069) -13.141,-43.875 -13.141,-43.113 -12.573,-42.545 -1.905,-42.545 -0.65,-43.8 J1.2
  Bottom Layer w0.254: v1(-13.335,-44.069) v1(-13.335,-40.132)
DIN: IC1.1 U3.27 | length 64.9
  Top Layer w0.254: IC1.1 10.204,-8.001 13.125,-5.08 23.876,-5.08 24.638,-4.318 24.638,6.985 23.889,7.734 21.349,7.734 19.939,9.144 19.939,16.002 16.51,19.431 10.287,19.431 10.287,25.842 9.192,26.937 8.923,26.937 8.575,27.285 U3.27
DTR: Q1.2 R10.2 U2.23 | length 96.8
  Top Layer w0.2: -12.027,-33.439 -11.799,-33.667 U2.23
  Top Layer w0.254: R10.2 -21.95,38.456 Q1.2 -21.95,32.523 -22.223,32.25 -22.741,32.25 -23.114,31.877 -23.114,29.359 -23.263,29.21 -29.293,29.21 -30.988,27.515 -30.988,-15.113 -28.829,-17.272 -14.478,-17.272 -13.843,-17.907 -13.843,-31.623 -12.027,-33.439
GND: C1.1 C2.1 C3.1 C4.1 C5.2 C6.2 C7.1 C8.1 C9.1 C10.1 C11.2 C12.1 C13.1 C14.1 IC1.4 IC1.9 J1.5 Jumper1.1 LED1.1 P1.2 R5.1 R11.1 R14.2 S1.2 U1.1 U1.7 U2.2 U2.25 U3.1 U3.15 U3.38 U4.1 U5.2 U6.5 U6.10 U6.12 | length 8.9
  Top Layer w0.254: v1(-16.764,1.905) -14.863,1.905 C10.1 ; v1(-16.764,5.207) C9.1 ; v1(-8.382,-44.069) -8.107,-44.069 -7.626,-44.55 R11.1 ; v1(6.858,-40.132) 6.9,-40.09 C6.2
  other v1: -11.599,-36.974 -10.499,-36.974 -11.599,-35.874 -10.499,-35.874
GPIO0: Q1.3 U3.25 | length 37.9
  Top Layer w0.254: Q1.3 -21,29.509 -20.828,29.337 v1(-18.923,29.337) ; v1@-11.176,29.845 -11.303,29.718 v1(-11.303,29.337) -11.303,23.622 -10.795,23.114 -8.128,23.114 -6.472,24.77 U3.25
  Bottom Layer w0.254: v1(-18.923,29.337) v1(-11.303,29.337)
IO13: R2.2 U3.16 | length 23.8
  Top Layer w0.254: R2.2 -24.5,22.087 -24.003,21.59 -5.08,21.59 -4.445,22.225 U3.16
IO35: R1.1 R5.2 U3.7 | length 51
  Top Layer w0.254: v1(-11.303,15.113) -11.303,11.684 -10.414,10.795 -6.858,10.795 ; v1@-11.303,32.004 -11.303,33.147 -10.79,33.66 U3.7 ; R1.1 -6.09,11.563 -6.858,10.795 ; R5.2 6.9,11.726 5.969,10.795 -6.858,10.795
  Bottom Layer w0.254: v1(-11.303,15.113) -10.16,15.113 -9.398,15.875 -9.398,30.861 -10.096,31.559 -11.282,31.559 v1(-11.303,31.538)
NetC5_1: C5.1 D1.1 Q3.1 Q3.2 Q3.3 U4.3 | length 36.8
  Top Layer w0.254: C5.1 -6.09,-30.982 -5.715,-30.607 -2.667,-30.607 -2.3,-30.24 ; U4.3@-2.325,-33.274 U4.3 -2.3,-30.24 ; Q3.3 Q3.2 Q3.1 10.481,-21.149 10.033,-20.701 6.952,-20.701 D1.1 6.825,-20.574 -1.524,-20.574 -2.3,-21.35 -2.3,-30.24
NetC12_2: C12.2 U6.2 | length 4.2
  Top Layer w0.254: U6.2 19.5,39.947 19.812,40.259 19.812,41.898 C12.2
NetDS1_2: DS1.2 R13.2 | length 12.9
  Top Layer w0.254: DS1.2 16.095,-45.5 17.39,-44.205 R13.2
NetIC1_18: IC1.18 R12.2 | length 8.8
  Top Layer w0.254: R12.2 -10.414,-1.27 -9.525,-0.381 IC1.18
NetJumper1_2: Jumper1.2 R15.1 U6.7
NetLED1_2: LED1.2 R2.1 | length 5.5
  Top Layer w0.254: LED1.2 -26.646,23.265 -26.289,23.622 -26.289,25.4 -26.049,25.64 R2.1
NetQ1_1: Q1.1 R9.1 | length 3.3
  Top Layer w0.254: Q1.1 -19.984,32.639 -19.05,32.639 -18.669,32.258 -18.669,31.899 -18.52,31.75 -17.602,31.75 R9.1
NetQ2_1: Q2.1 R10.1 | length 5.7
  Top Layer w0.254: R10.1 -20.066,38.472 -20.066,36.576 -19.812,36.322 -17.653,36.322 -17.45,36.525 Q2.1
NetR6_1: R6.1 U1.2 | length 7.2
  Top Layer w0.254: R6.1 15.113,28.194 15.621,28.702 15.621,30.988 16.058,31.425 U1.2
NetR7_1: R7.1 U1.5 | length 7.3
  Top Layer w0.254: R7.1 21.336,28.194 21.59,28.448 21.59,32.258 21.123,32.725 U1.5
NetR13_1: R13.1 U5.1 | length 8.3
  Top Layer w0.254: U5.1 16.928,-29.374 17.39,-29.836 R13.1
NetR14_1: R14.1 U5.5 | length 7
  Top Layer w0.254: U5.5 12.573,-29.401 12.573,-32.258 12.827,-32.512 13.462,-32.512 13.8,-32.85 R14.1
RESET: C4.2 Q2.3 R8.1 S1.1 U3.3 | length 39.8
  Top Layer w0.254: C4.2 -21,23.032 -20.658,22.69 S1.1 -16.457,22.733 -13.589,22.733 -12.954,23.368 -12.954,38.735 -13.7,39.481 Q2.3 -16.5,40.65 -16.256,40.894 -11.14,40.894 R8.1 -11.049,39.243 -10.546,38.74 U3.3
ROW1: IC1.22 Up1.1 | length 21.1
  Top Layer w0.254: Up1.1 -9.144,-8.89 -8.89,-8.636 -8.89,-6.223 -8.128,-5.461 IC1.22
ROW2: IC1.14 Up1.6 | length 20.2
  Top Layer w0.254: Up1.6 -20.066,3.81 -17.272,6.604 -11.684,6.604 -9.779,4.699 IC1.14
ROW3: Dw1.8 IC1.16 | length 85
  Top Layer w0.254: v1(-9.017,2.159) IC1.16
  Bottom Layer w0.254: v1(-9.017,2.159) -9.017,2.413 -10.16,3.556 -18.288,3.556 -19.304,2.54 -25.019,2.54 -25.908,1.651 -25.908,-9.906 -25.019,-10.795 22.225,-10.795 22.86,-10.16 Dw1.8
ROW4: IC1.20 Up1.4 | length 20.6
  Top Layer w0.254: Up1.4 -19.939,-1.27 -16.256,-4.953 -10.668,-4.953 -8.636,-2.921 IC1.20
ROW5: Dw1.1 IC1.23 | length 54.2
  Top Layer w0.254: IC1.23 -0.889,-6.731 0.127,-7.747 0.127,-9.144 1.524,-10.541 24.743,-10.541 25.781,-9.503 25.781,8.382 25.273,8.89 Dw1.1
ROW6: Dw1.7 IC1.21 | length 33.1
  Top Layer w0.254: IC1.21 0.127,-4.191 0.762,-4.826 0.762,-8.741 1.292,-9.271 10.287,-9.271 13.208,-6.35 Dw1.7
ROW7: Dw1.2 IC1.15 | length 30.1
  Top Layer w0.254: IC1.15 -2.032,3.429 -1.968,3.492 v1(-1.905,3.429)
  Bottom Layer w0.254: v1(-1.905,3.429) -1.905,5.715 -1.27,6.35 Dw1.2
ROW8: Dw1.5 IC1.17 | length 30.9
  Top Layer w0.254: IC1.17 -2.286,0.889 -1.905,0.508 v1(-1.905,-0.381)
  Bottom Layer w0.254: v1@-1.905,-0.254 -1.905,1.016 -1.651,1.27 13.843,1.27 16.383,-1.27 Dw1.5
RTS: Q2.2 R9.2 U2.19 | length 104
  Top Layer w0.2: U2.19 -9.799,-33.655
  Top Layer w0.254: Q2.2 -15.55,31.598 R9.2 -15.575,29.545 -17.053,28.067 -29.718,28.067 -30.353,27.432 -30.353,-14.478 -28.321,-16.51 -11.176,-16.51 -9.799,-17.887 -9.799,-33.655
RXD0: U2.21 U3.34 | length 116.1
  Top Layer w0.2: -11.176,-33.528 -10.799,-33.905 U2.21 ; v1(4.953,34.502) 5.08,34.629 5.08,35.56 5.72,36.2 U3.34
  Top Layer w0.254: v1(-12.446,-29.337) -12.446,-32.258 -11.176,-33.528
  Bottom Layer w0.254: v1(-12.446,-29.337) -14.097,-29.337 -19.304,-24.13 -25.908,-24.13 -27.559,-22.479 -27.559,31.242 -24.299,34.502 v1(4.953,34.502)
SCL: R3.1 U1.4 U3.36 U6.4 | length 25.2
  Top Layer w0.254: U3.36 8.58,38.735 9.906,38.735 10.16,38.481 R3.1 11.575,37.193 12.065,36.703 14.859,36.703 15.367,36.195 ; v1(15.367,38.227) 15.367,36.195 ; v1(15.367,41.783) 18.5,38.65 U6.4 ; U1.4 15.789,32.725 15.367,33.147 15.367,36.195
  Bottom Layer w0.254: v1(15.367,38.227) v1(15.367,41.783)
SDA: R4.1 U1.3 U3.37 U6.6 | length 21.4
  Top Layer w0.254: U3.37 11.054,40.01 ; R4.1 11.575,40.531 11.054,40.01 ; U6.6@17.644,37.11 16.637,37.11 ; U1.3 18.74,32.075 19.05,32.385 19.05,33.655 18.796,33.909 17.399,33.909 16.637,34.671 16.637,37.11 ; 11.054,40.01 15.87,40.01 16.637,39.243 16.637,37.11
TXD0: U2.20 U3.35 | length 120.1
  Top Layer w0.2: -10.307,-33.481 -10.299,-33.489 U2.20
  Top Layer w0.254: v1(-10.922,-29.337) -10.922,-32.639 -10.307,-33.254 -10.307,-33.481 ; v1(4.953,37.465) 8.57,37.465 U3.35
  Bottom Layer w0.254: v1(-10.922,-29.337) -10.922,-30.353 -11.176,-30.607 -13.716,-30.607 -19.558,-24.765 -25.991,-24.765 -28.067,-22.689 -28.067,31.452 -24.34,35.179 2.667,35.179 v1(4.953,37.465)
VBAT: C11.1 P1.1 Q3.5 Q3.6 Q3.7 Q3.8 R1.2 U5.3 | length 110.4
  Top Layer w0.3: Q3.5 17.003,-23.099 ; Q3.6 16.988,-22.449 ; Q3.7 17.1,-21.799 ; Q3.8 17.085,-21.149
  Top Layer w0.4: v1(-6.096,17.653) -6.09,17.647 R1.2 ; U5.3 15,-25.894 15.24,-25.654 17.653,-25.654 ; 16.988,-22.449 17.272,-22.733 ; 17.003,-23.099 17.137,-23.233 17.272,-23.099 ; 17.085,-21.149 17.272,-21.336 ; 17.1,-21.799 17.272,-21.971 ; v1(17.272,-19.431) 17.272,-21.336 ; C11.1 21,-26.207 20.447,-25.654 ; P1.1 29.724,-26.281 29.021,-25.654 20.447,-25.654 ; 17.272,-23.099 17.272,-25.273 17.653,-25.654 ; 17.272,-23.099 17.272,-22.733 ; 17.272,-22.733 17.272,-21.971 ; 17.272,-21.971 17.272,-21.336 ; 17.653,-25.654 20.447,-25.654
  Bottom Layer w0.4: v1(-6.096,17.653) -2.667,17.653 3.429,11.557 25.019,11.557 26.035,10.541 26.035,-18.034 24.638,-19.431 v1(17.272,-19.431)
VBUS: D1.2 DS1.1 J1.1 Q3.4 R11.2 U2.8 U5.4 | length 75.9
  Top Layer w0.2: U2.8 -11.799,-39.255 -11.049,-40.005 v1(-11.049,-40.132) ; v1(-11.049,-44.069) -11.049,-47.117 -9.906,-48.26 -6.858,-48.26 -6.223,-47.625 -6.223,-46.583 R11.2 ; v1(-3.175,-43.942) -1.905,-43.942 -1.3,-44.547 J1.1 ; v1(6.477,-45.466) 6.511,-45.5 DS1.1 8.46,-28.497 ; D1.2 8.128,-23.599 8.46,-23.931 8.46,-28.497 ; Q3.4@12.192,-23.169 12.262,-23.099 Q3.4 12.3,-25.127 12.6,-25.427 U5.4 9.483,-27.474 8.46,-28.497
  Bottom Layer w0.2: v1@-10.986,-44.005 v1(-11.049,-44.069) v1(-11.049,-40.132) -4.191,-40.132 -3.175,-41.148 v1(-3.175,-43.942) -3.048,-43.815 6.223,-43.815 6.477,-44.069 v1(6.477,-45.466)
pads on no net: IC1.24 J1.4 J1.6 J1.7 J1.8 J1.9 J1.10 J1.11 P1.MP1 P1.MP2 S1.MH1 S1.MH2 U2.1 U2.9 U2.10 U2.11 U2.12 U2.13 U2.14 U2.15 U2.16 U2.17 U2.18 U2.22 U2.24 U3.9 U3.12 U3.14 U3.17 U3.18 U3.19 U3.20 U3.21 U3.22 U3.23 U3.24 U3.29 U3.30 U3.31 U3.32 U6.3 U6.8 U6.9 U6.11 U6.13 U6.15 U6.16

## Polygon pours and split planes (outlines as drawn)
3V3 on Top Layer "3V3" (solid, remove dead copper, shelved, pour order 0): -50,0 ccw(c0,0) 0,-50 ccw(c0,0) 50,0 ccw(c0,0) 0,50 ccw(c0,0)
GND on Bottom Layer "GND" (solid, remove dead copper, shelved, pour order 1): -50,0 ccw(c0,0) 0,-50 ccw(c0,0) 50,0 ccw(c0,0) 0,50 ccw(c0,0)

## Keep-outs
Keep-Out Layer:
  circle w0.254: c0,0 r50

## Other copper
Bottom Layer:
  region net A0: 30,28 30,22 33,22 33,28

## Text inside footprints (layer, text, board x,y; h text height)
J1: Mechanical 6 "PCB EDGE" at -7.2,-50 h0.3